# EAGLE board main (EAGLE 8.3.2), part 1 of 2
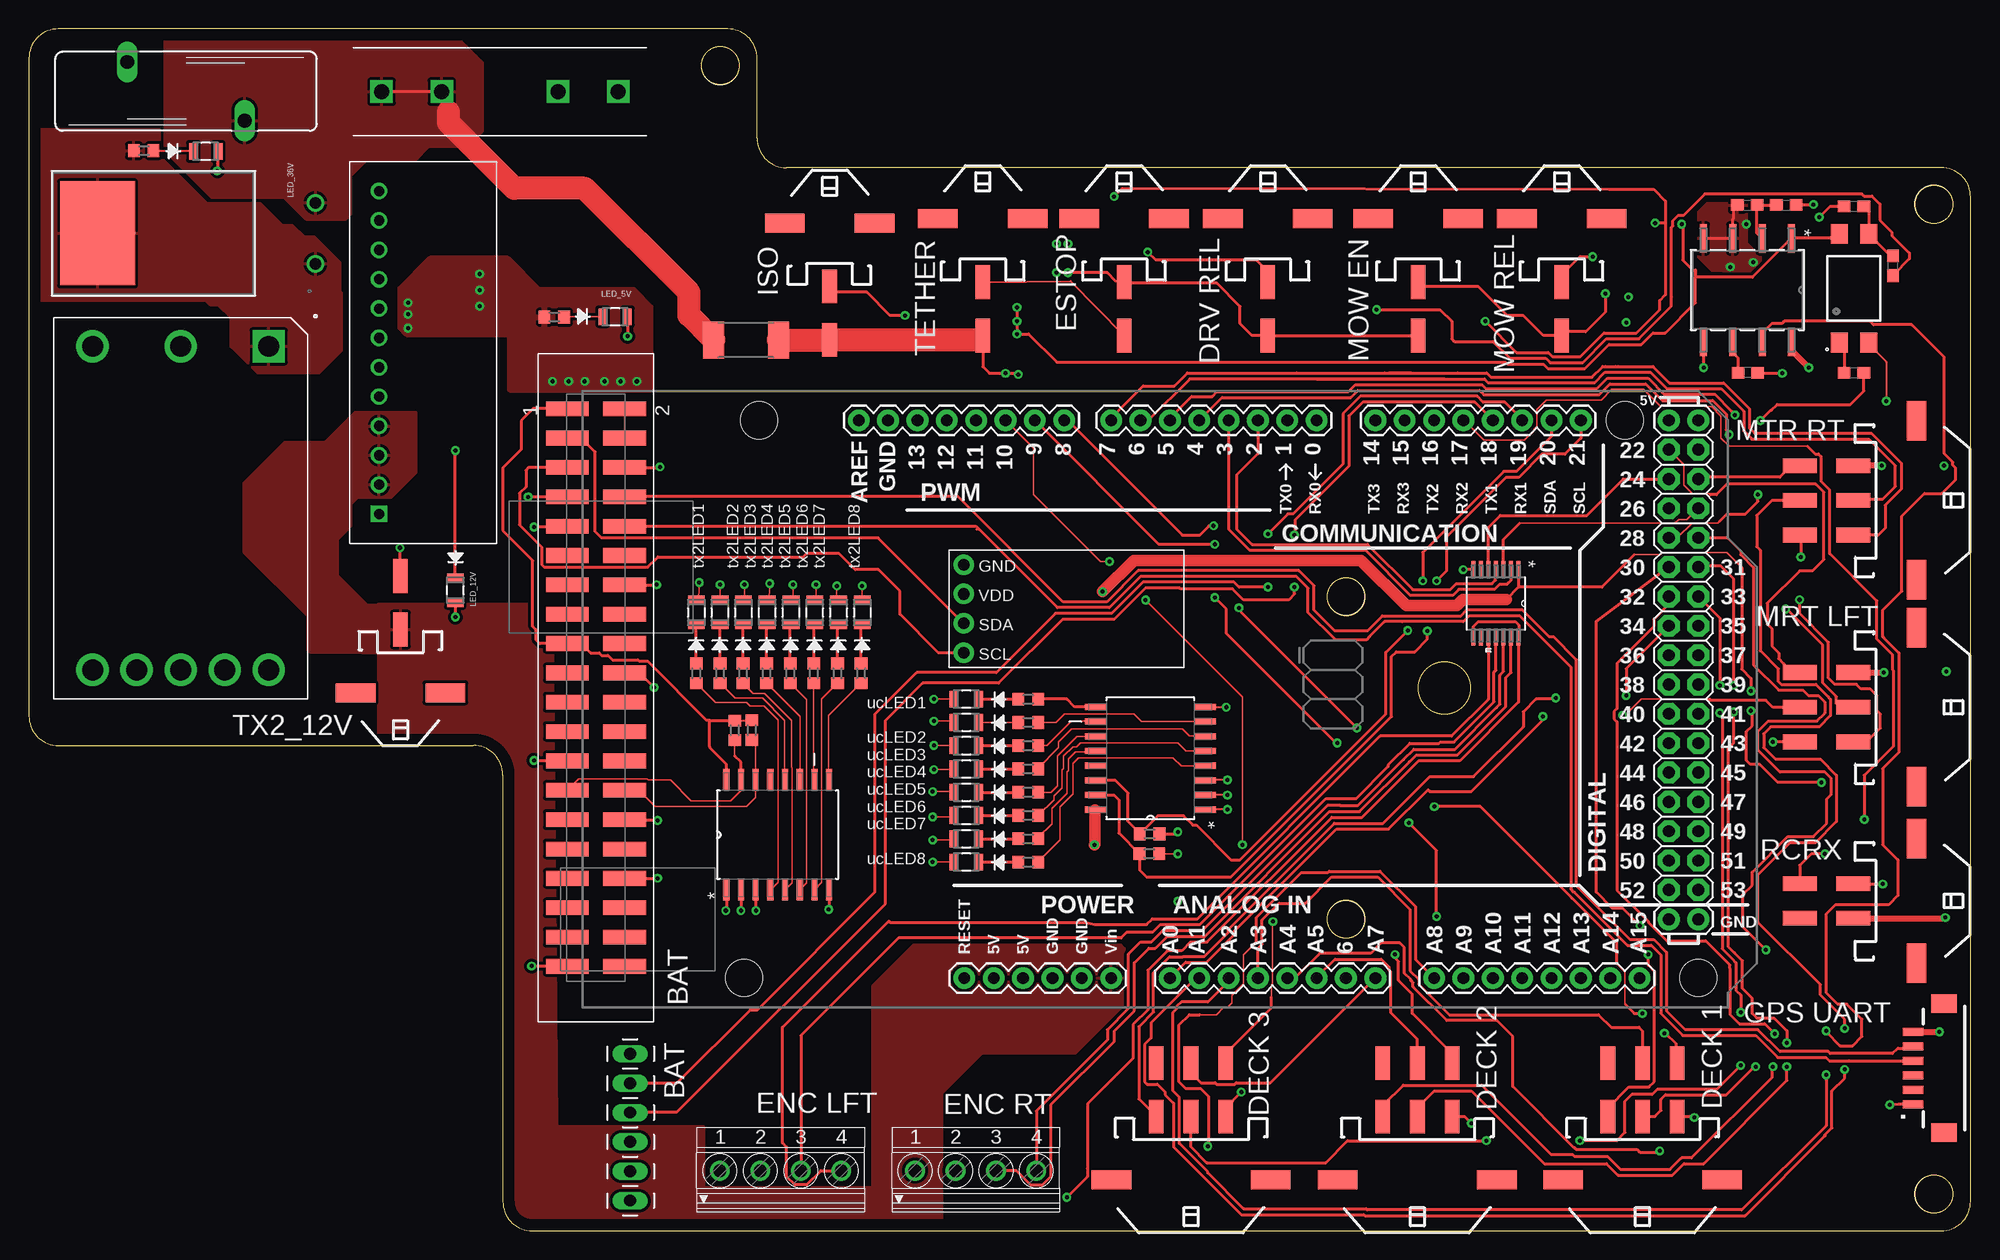
[diagram p0: board, top side]
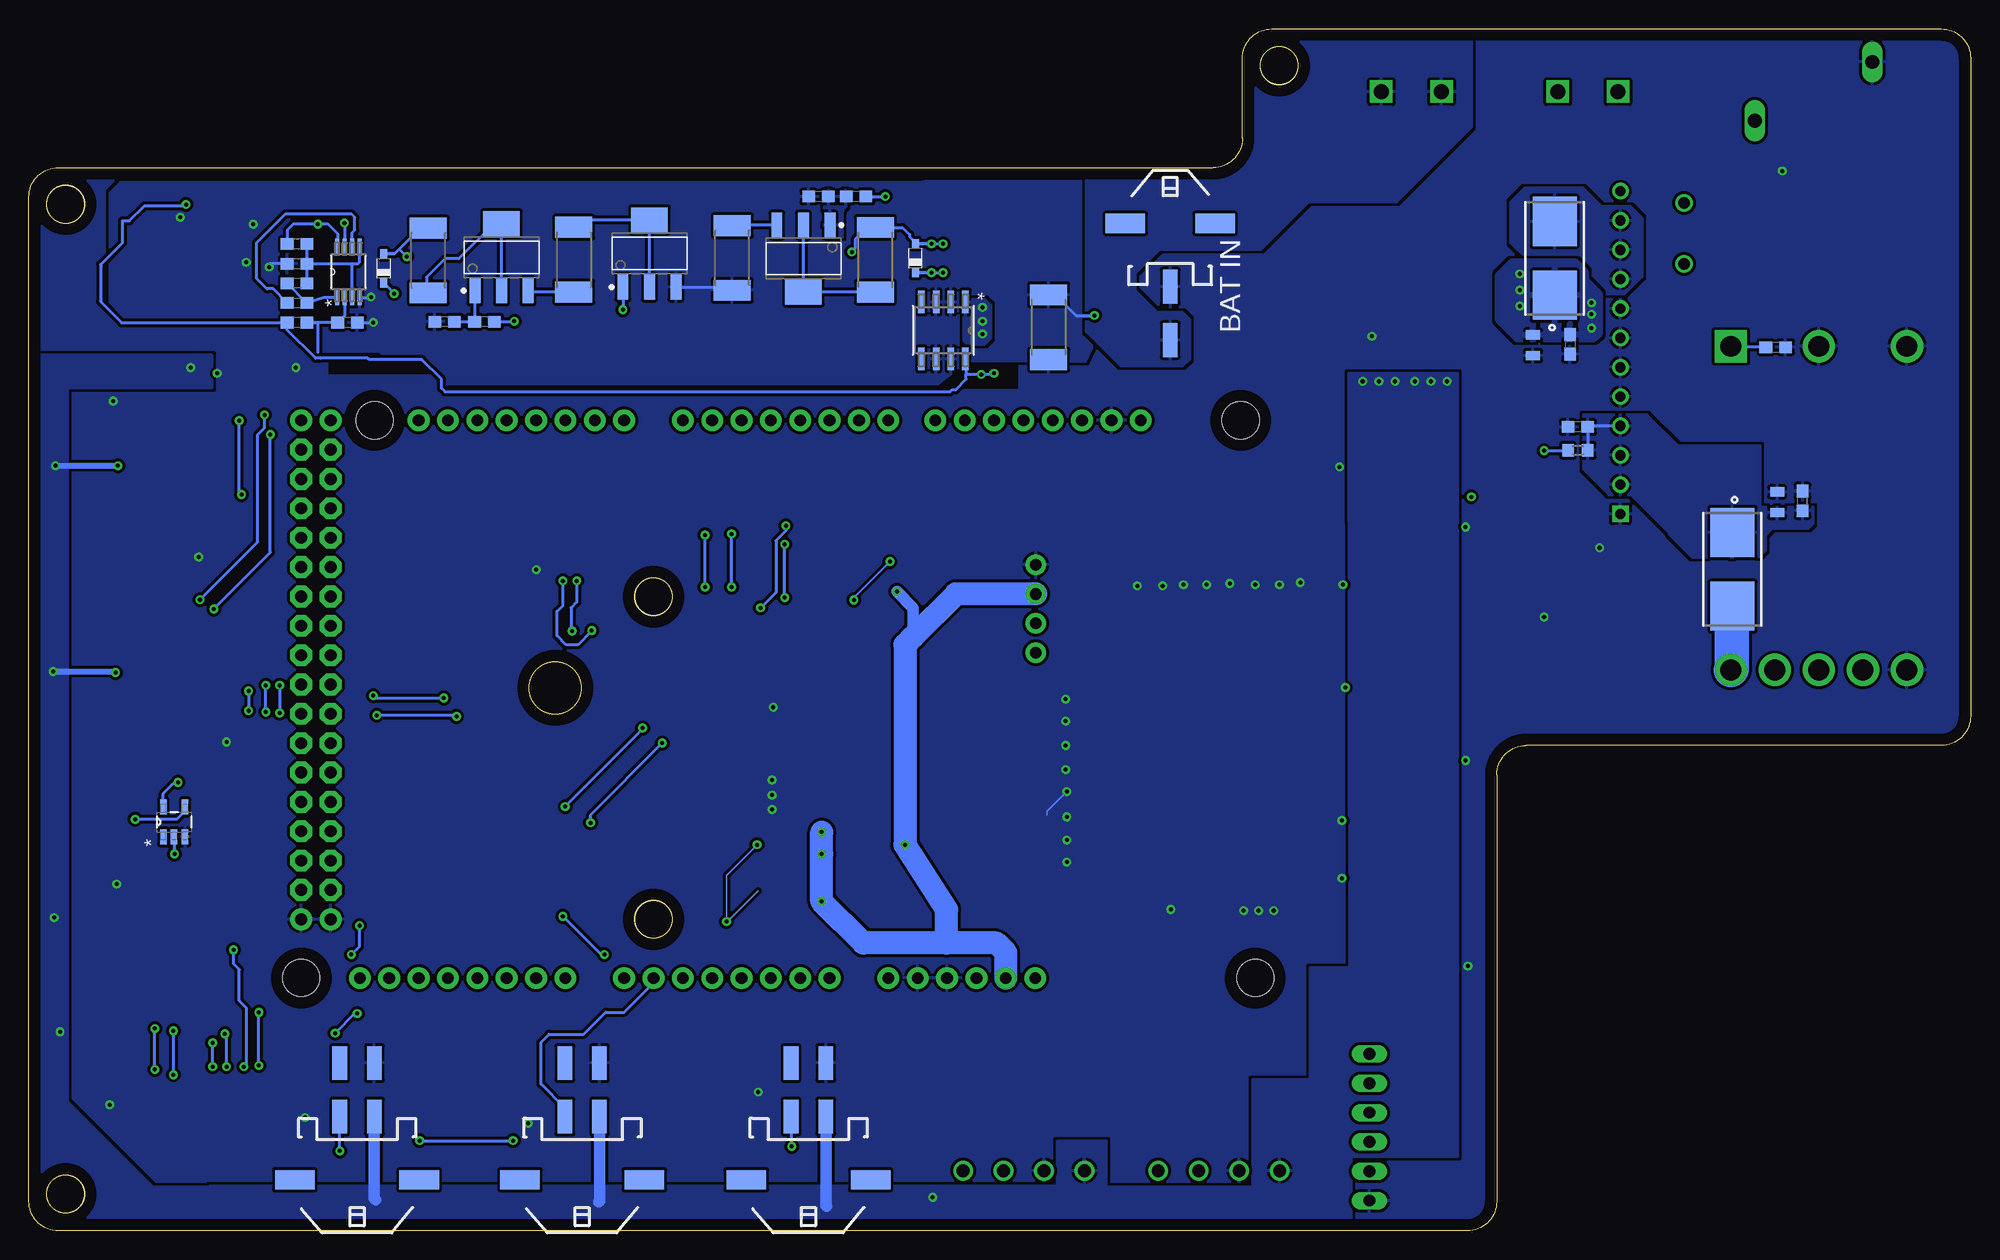
[diagram p1: board, bottom side, seen from below]

Size 168 x 104 mm. Coordinates in mm from the lower left corner, seen from the top.
Outline: 41,39.46 41,2.54 arc90 43.54,0 165.46,0 arc90 168,2.54 168,89.46 arc90 165.46,92 65.54,92 arc-90 63,94.54 63,101.46 arc90 60.46,104 2.54,104 arc90 0,101.46 0,44.54 arc90 2.54,42 38.46,42 arc-90 41,39.46
Outline: circle at 164.82,88.83 radius 1.63
Outline: circle at 164.82,3.17 radius 1.63
Outline: circle at 59.82,100.82 radius 1.63
Outline: circle at 113.96,54.85 radius 1.63
Outline: circle at 113.96,26.95 radius 1.63
Outline: circle at 122.46,46.97 radius 2.25
Copper layers (1*16): Top 0.035mm / dielectric 1.5mm / Bottom 0.035mm
Design rules "default *": minimum track width 0.15mm, minimum drill 0.33mm, track to track 10mil, track to pad 10mil, pad to pad 10mil, via to via 10mil, smd to smd 10mil, copper to edge 40mil, drill to drill 6mil, minimum pad ring 10mil, minimum via ring 8mil, stop-mask expansion 3mil, vias tented up to drill 0mil, thermal gap 10mil
Holes 3.26 mm at 164.82,88.83 59.82,100.82 164.82,3.17
Holes 4.5 mm at 122.46,46.97

## Footprints (pad centres in the part's own frame; a part is rotated, then mirrored left to right if it is on the bottom)
1X06 = drill 1.016 long: 1 -6.35,0; 2 -3.81,0; 3 -1.27,0; 4 1.27,0; 5 3.81,0; 6 6.35,0
LED_CMD17-21VGD_TR8 = smd 0.762 x 1.448: 1 -1.067,0; 2 1.067,0
R0603 = smd 1 x 1.1: 1 -0.85,0; 2 0.85,0
SOIC127P1032X265-16N = smd 1.803 x 0.533: 1 -4.775,4.445; 2 -4.775,3.175; 3 -4.775,1.905; 4 -4.775,0.635; 5 -4.775,-0.635; 6 -4.775,-1.905; 7 -4.775,-3.175; 8 -4.775,-4.445; 9 4.775,-4.445; 10 4.775,-3.175; 11 4.775,-1.905; 12 4.775,-0.635; 13 4.775,0.635; 14 4.775,1.905; 15 4.775,3.175; 16 4.775,4.445
TSM-120-XX-XXX-D = smd 1.27 x 3.683: 1 24.13,2.477; 2 24.13,-2.477; 3 21.59,2.477; 4 21.59,-2.477; 5 19.05,2.477; 6 19.05,-2.477; 7 16.51,2.477; 8 16.51,-2.477; 9 13.97,2.477; 10 13.97,-2.477; 11 11.43,2.477; 12 11.43,-2.477; 13 8.89,2.477; 14 8.89,-2.477; 15 6.35,2.477; 16 6.35,-2.477; 17 3.81,2.477; 18 3.81,-2.477; 19 1.27,2.477; 20 1.27,-2.477; 21 -1.27,2.477; 22 -1.27,-2.477; 23 -3.81,2.477; 24 -3.81,-2.477; 25 -6.35,2.477; 26 -6.35,-2.477; 27 -8.89,2.477; 28 -8.89,-2.477; 29 -11.43,2.477; 30 -11.43,-2.477; 31 -13.97,2.477; 32 -13.97,-2.477; 33 -16.51,2.477; 34 -16.51,-2.477; 35 -19.05,2.477; 36 -19.05,-2.477; 37 -21.59,2.477; 38 -21.59,-2.477; 39 -24.13,2.477; 40 -24.13,-2.477
ARDUINO_MEGA = drill 1.016 pad 1.88: 0 13.97,24.13; 1 11.43,24.13; 2 8.89,24.13; 3 6.35,24.13; 3.3V -13.97,-24.13; 4 3.81,24.13; 5 1.27,24.13; 5V@0 -11.43,-24.13; 5V@1 44.45,24.13; 5V@2 46.99,24.13; 6 -1.27,24.13; 7 -3.81,24.13; 8 -7.874,24.13; 9 -10.414,24.13; 10 -12.954,24.13; 11 -15.494,24.13; 12 -18.034,24.13; 13 -20.574,24.13; 14 19.05,24.13; 15 21.59,24.13; 16 24.13,24.13; 17 26.67,24.13; 18 29.21,24.13; 19 31.75,24.13; 20 34.29,24.13; 21 36.83,24.13; A0 1.27,-24.13; A1 3.81,-24.13; A2 6.35,-24.13; A3 8.89,-24.13; A4 11.43,-24.13; A5 13.97,-24.13; A6 16.51,-24.13; A7 19.05,-24.13; A8 24.13,-24.13; A9 26.67,-24.13; A10 29.21,-24.13; A11 31.75,-24.13; A12 34.29,-24.13; A13 36.83,-24.13; A14 39.37,-24.13; A15 41.91,-24.13; AREF -25.654,24.13; GND@0 -8.89,-24.13; GND@1 -6.35,-24.13; GND@2 44.45,-19.05; GND@3 46.99,-19.05; GND@4 -23.114,24.13; RESET -16.51,-24.13; VIN -3.81,-24.13 | drill 1.016 pad 1.88 octagon: 22 44.45,21.59; 23 46.99,21.59; 24 44.45,19.05; 25 46.99,19.05; 26 44.45,16.51; 27 46.99,16.51; 28 44.45,13.97; 29 46.99,13.97; 30 44.45,11.43; 31 46.99,11.43; 32 44.45,8.89; 33 46.99,8.89; 34 44.45,6.35; 35 46.99,6.35; 36 44.45,3.81; 37 46.99,3.81; 38 44.45,1.27; 39 46.99,1.27; 40 44.45,-1.27; 41 46.99,-1.27; 42 44.45,-3.81; 43 46.99,-3.81; 44 44.45,-6.35; 45 46.99,-6.35; 46 44.45,-8.89; 47 46.99,-8.89; 48 44.45,-11.43; 49 46.99,-11.43; 50 44.45,-13.97; 51 46.99,-13.97; 52 44.45,-16.51; 53 46.99,-16.51 | hole 3.2: -34.29,24.13; -35.56,-24.13; 16.51,8.89; 16.51,-19.05; 40.64,24.13; 46.99,-24.13
43045-0609 = smd 1.27 x 2.92: P$1 3,5.47; P$2 0,5.47; P$3 -3,5.47; P$4 3,10.1; P$5 0,10.1; P$6 -3,10.1 | smd 3.43 x 1.65: TAB1 -6.88,0; TAB2 6.88,0
43045-0409 = smd 1.27 x 2.92: P$1 1.5,5.47; P$2 -1.5,5.47; P$3 1.5,10.1; P$4 -1.5,10.1 | smd 3.43 x 1.65: TAB1 -5.38,0; TAB2 5.38,0
C0603 = smd 1.1 x 1: 1 -0.85,0; 2 0.85,0
FUSE_0154004.DR = smd 4.24 x 3.81: 1 -3.19,0; 2 3.19,0
0805 = smd 0.8 x 1.2: 1 -0.9,0; 2 0.9,0
SIP-12 = drill 0.889 pad 1.422 square: ENABLE 0,13.97 | drill 0.889 pad 1.422: GND1 0,3.81; GND2 0,1.27; GND3 0,-1.27; GND4 0,-3.81; VIN1 0,11.43; VIN2 0,8.89; VIN3 0,6.35; VOUT1 0,-6.35; VOUT2 0,-8.89; VOUT3 0,-11.43; VOUT-ADJ 0,-13.97
V36SE12004NRFA-TH = drill 1.8 pad 2.8: +SENSE 14,3.81; +VOUT 14,7.62; -SENSE 14,-3.81; -VIN -14,-7.62; -VOUT 14,-7.62; ENABLE -14,0; TRIM 14,0 | drill 1.8 pad 2.8 square: +VIN -14,7.62
SOT95P280X145-5N = smd 1.27 x 0.559: 1 -1.295,0.94; 2 -1.295,0; 3 -1.295,-0.94; 4 1.295,-0.94; 5 1.295,0.94
TO220AC = drill 1.016 pad 1.524: 1 -5.283,-28.042; 3 0,-28.042 | smd 8.992 x 6.477: 2 -2.64,-9.195
LF445_0.807IN = drill 1.295 square: 1 -10.236,0; 2 -5.029,0; 3 5.029,0; 4 10.236,0
0603 = smd 1.1 x 1: 1 -0.85,0; 2 0.85,0
DUB8 = smd 2.451 x 0.61: 1 -4.477,3.81; 2 -4.477,1.27; 3 -4.477,-1.27; 4 -4.477,-3.81; 5 4.477,-3.81; 6 4.477,-1.27; 7 4.477,1.27; 8 4.477,3.81
SOIC254P1016X390-4N = smd 1.7 x 1.45: 1 -4.7,1.27; 2 -4.7,-1.27; 3 4.7,-1.27; 4 4.7,1.27
43045-0209 = smd 1.27 x 2.92: P$1 0,5.47; P$2 0,10.1 | smd 3.43 x 1.65: TAB1 -3.88,0; TAB2 3.88,0
S20K440 = drill 1.194 long: 1 -2.54,-5.08; 2 2.54,5.08
R2512 = smd 1.8 x 3.2: 1 -2.8,0; 2 2.8,0
M08A = smd 1.981 x 0.559: 1 -2.464,1.905; 2 -2.464,0.635; 3 -2.464,-0.635; 4 -2.464,-1.905; 5 2.464,-1.905; 6 2.464,-0.635; 7 2.464,0.635; 8 2.464,1.905
SOD323_ST = smd 0.8 x 0.6: A 1.25,0; C -1.25,0
SOT230P700X160-4N = smd 2.15 x 0.95: 1 -2.9,2.3; 2 -2.9,0; 3 -2.9,-2.3 | smd 2.15 x 3.15: 4 2.9,0
SOP65P490X110-8N = smd 1.372 x 0.356: 1 -2.21,0.965; 2 -2.21,0.33; 3 -2.21,-0.33; 4 -2.21,-0.965; 5 2.21,-0.965; 6 2.21,-0.33; 7 2.21,0.33; 8 2.21,0.965
1751264 = drill 1.1 pad 1.7: 1 -5.25,-0.1; 2 -1.75,-0.1; 3 1.75,-0.1; 4 5.25,-0.1
SPARKFUN-9DOF-BREAKOUT = drill 1 pad 1.778: GND 1.27,8.89; SCL 1.27,1.27; SDA 1.27,3.81; VDD 1.27,6.35
DF13C-6P-1.25V = smd 1.6 x 2.2: M$0 5.575,-1.8; M$1 -5.575,-1.8 | smd 0.7 x 1.8: P$1 -3.125,0.9; P$2 -1.875,0.9; P$3 -0.625,0.9; P$4 0.625,0.9; P$5 1.875,0.9; P$6 3.125,0.9
SOP65P640X120-14N = smd 1.473 x 0.356: 1 -2.921,1.956; 2 -2.921,1.295; 3 -2.921,0.66; 4 -2.921,0; 5 -2.921,-0.66; 6 -2.921,-1.295; 7 -2.921,-1.956; 8 2.921,-1.956; 9 2.921,-1.295; 10 2.921,-0.66; 11 2.921,0; 12 2.921,0.66; 13 2.921,1.295; 14 2.921,1.956

## Placement (x,y rotation side)
JETSON1:JETSON_J17_UART1:JP3  61300611121  [1X06]  52.02,8.95 90 top
JETSON1:JETSON_TX2_J21_EXPANSION1:LED1  CMD17-21VGD_TR8  [LED_CMD17-21VGD_TR8]  57.76,53.5 90 top
JETSON1:JETSON_TX2_J21_EXPANSION1:LED2  CMD17-21VGD_TR8  [LED_CMD17-21VGD_TR8]  61.82,53.5 90 top
JETSON1:JETSON_TX2_J21_EXPANSION1:LED3  CMD17-21VGD_TR8  [LED_CMD17-21VGD_TR8]  65.93,53.5 90 top
JETSON1:JETSON_TX2_J21_EXPANSION1:LED4  CMD17-21VGD_TR8  [LED_CMD17-21VGD_TR8]  70.05,53.5 90 top
JETSON1:JETSON_TX2_J21_EXPANSION1:LED5  CMD17-21VGD_TR8  [LED_CMD17-21VGD_TR8]  72.11,53.5 90 top
JETSON1:JETSON_TX2_J21_EXPANSION1:LED6  CMD17-21VGD_TR8  [LED_CMD17-21VGD_TR8]  67.99,53.5 90 top
JETSON1:JETSON_TX2_J21_EXPANSION1:LED7  CMD17-21VGD_TR8  [LED_CMD17-21VGD_TR8]  63.88,53.5 90 top
JETSON1:JETSON_TX2_J21_EXPANSION1:LED8  CMD17-21VGD_TR8  [LED_CMD17-21VGD_TR8]  59.8,53.5 90 top
JETSON1:JETSON_TX2_J21_EXPANSION1:R1  60  [R0603]  57.74,48.23 270 top
JETSON1:JETSON_TX2_J21_EXPANSION1:R2  60  [R0603]  61.79,48.23 270 top
JETSON1:JETSON_TX2_J21_EXPANSION1:R3  60  [R0603]  65.87,48.23 270 top
JETSON1:JETSON_TX2_J21_EXPANSION1:R4  60  [R0603]  69.96,48.23 270 top
JETSON1:JETSON_TX2_J21_EXPANSION1:R5  60  [R0603]  72,48.23 270 top
JETSON1:JETSON_TX2_J21_EXPANSION1:R6  60  [R0603]  67.91,48.23 270 top
JETSON1:JETSON_TX2_J21_EXPANSION1:R7  60  [R0603]  63.83,48.23 270 top
JETSON1:JETSON_TX2_J21_EXPANSION1:R8  60  [R0603]  59.8,48.23 270 top
JETSON1:JETSON_TX2_J21_EXPANSION1:R9  10k  [R0603]  61.07,43.3 90 top
JETSON1:JETSON_TX2_J21_EXPANSION1:R10  10k  [R0603]  62.54,43.32 90 top
JETSON1:JETSON_TX2_J21_EXPANSION1:U1  PCF8574ATD  [SOIC127P1032X265-16N]  64.79,34.27 90 top
JETSON1:JETSON_TX2_J21_EXPANSION1:U$3  TSM-120-XX-XXX-DV  [TSM-120-XX-XXX-D]  49.06,47 90 top
MICROCONTROLLER1:LED1  CMD17-21VGD_TR8  [LED_CMD17-21VGD_TR8]  81.11,31.9 180 top
MICROCONTROLLER1:LED2  CMD17-21VGD_TR8  [LED_CMD17-21VGD_TR8]  81.11,35.93 180 top
MICROCONTROLLER1:LED3  CMD17-21VGD_TR8  [LED_CMD17-21VGD_TR8]  81.11,39.96 180 top
MICROCONTROLLER1:LED4  CMD17-21VGD_TR8  [LED_CMD17-21VGD_TR8]  81.11,43.99 180 top
MICROCONTROLLER1:LED5  CMD17-21VGD_TR8  [LED_CMD17-21VGD_TR8]  81.11,46 180 top
MICROCONTROLLER1:LED6  CMD17-21VGD_TR8  [LED_CMD17-21VGD_TR8]  81.11,41.97 180 top
MICROCONTROLLER1:LED7  CMD17-21VGD_TR8  [LED_CMD17-21VGD_TR8]  81.11,37.94 180 top
MICROCONTROLLER1:LED8  CMD17-21VGD_TR8  [LED_CMD17-21VGD_TR8]  81.11,33.91 180 top
MICROCONTROLLER1:R1  60  [R0603]  86.47,31.9 0 top
MICROCONTROLLER1:R2  60  [R0603]  86.47,35.93 0 top
MICROCONTROLLER1:R3  60  [R0603]  86.47,39.96 0 top
MICROCONTROLLER1:R4  60  [R0603]  86.47,43.99 0 top
MICROCONTROLLER1:R5  60  [R0603]  86.47,46 0 top
MICROCONTROLLER1:R6  60  [R0603]  86.47,41.97 0 top
MICROCONTROLLER1:R7  60  [R0603]  86.47,37.94 0 top
MICROCONTROLLER1:R8  60  [R0603]  86.47,33.91 0 top
MICROCONTROLLER1:R9  10k  [R0603]  96.94,32.62 0 top
MICROCONTROLLER1:R10  10k  [R0603]  96.97,34.34 0 top
MICROCONTROLLER1:U1  PCF8574ATD  [SOIC127P1032X265-16N]  97.03,40.88 180 top
MICROCONTROLLER1:U$1  ARDUINO_MEGA_R3FULL  [ARDUINO_MEGA]  97.45,46 0 top
MOTOR_TOP1:JDL  43045-0609  [43045-0609]  163.32,45.3 90 top
MOTOR_TOP1:JDR  43045-0609  [43045-0609]  163.32,63.2 90 top
MOTOR_TOP1:X3  43045-0609  [43045-0609]  139.61,4.41 0 top
MOTOR_TOP1:X4  43045-0609  [43045-0609]  120.13,4.41 0 top
MOTOR_TOP1:X5  43045-0609  [43045-0609]  100.55,4.41 0 top
MOTOR_TOP1:X6  43045-0409  [43045-0409]  139.61,4.41 0 bottom
MOTOR_TOP1:X7  43045-0409  [43045-0409]  120.13,4.41 0 bottom
MOTOR_TOP1:X8  43045-0409  [43045-0409]  100.55,4.41 0 bottom
POWER_TOP1:C1  1uF  [C0603]  16.87,76.45 0 bottom
POWER_TOP1:C2  100uF  [C0603]  14.54,63.16 90 bottom
POWER_TOP1:C3  1uF  [C0603]  33.98,69.56 180 bottom
POWER_TOP1:C4  100uF  [C0603]  34.66,76.7 270 bottom
POWER_TOP1:F1  0154004.DR  [FUSE_0154004.DR]  35.99,84.15 90 bottom
POWER_TOP1:F2  0154004.DR  [FUSE_0154004.DR]  20.61,57.23 270 bottom
POWER_TOP1:LED1  CMD17-21VGD_TR8  [LED_CMD17-21VGD_TR8]  15.3,93.4 0 top
POWER_TOP1:LED2  CMD17-21VGD_TR8  [LED_CMD17-21VGD_TR8]  36.89,55.43 270 top
POWER_TOP1:LED3  CMD17-21VGD_TR8  [LED_CMD17-21VGD_TR8]  50.72,79.09 0 top
POWER_TOP1:MOV1  AVR-M2012C120MT6AB  [0805]  16.74,63.04 90 bottom
POWER_TOP1:MOV2  VC080503A100DP  [0805]  37.86,76.62 270 bottom
POWER_TOP1:R2  495  [R0603]  33.98,67.54 0 bottom
POWER_TOP1:R3  145  [R0603]  45.46,79.06 180 top
POWER_TOP1:R4  1695  [R0603]  9.94,93.46 180 top
POWER_TOP1:U$1  R-745.0P  [SIP-12]  30.3,75.99 180 top
POWER_TOP1:U$2  V36SE12004NRFA  [V36SE12004NRFA-TH]  13.13,62.53 270 top
RC_INPUT1:U1  NC7SZ04M5  [SOT95P280X145-5N]  155.43,35.37 90 bottom
RC_INPUT1:X1  43045-0409  [43045-0409]  163.32,28.54 90 top
RELAY_CONTROL_TOP1:D2  STPS20M60D  [TO220AC]  -3.25,88.95 90 top
RELAY_CONTROL_TOP1:FH3  FUSE_HOLDER_0.205X0.787IN  [LF445_0.807IN]  40.75,98.57 180 top
RELAY_CONTROL_TOP1:ISO1:R1  47k  [0603]  157.91,88.65 0 top
RELAY_CONTROL_TOP1:ISO1:R2  330k  [0603]  148.72,74.25 180 top
RELAY_CONTROL_TOP1:ISO1:R3  1.20k  [0603]  157.91,74.25 0 top
RELAY_CONTROL_TOP1:ISO1:R4  1.20k  [0603]  161.3,83.5 90 top
RELAY_CONTROL_TOP1:ISO1:R5  330k  [0603]  152.04,88.75 0 top
RELAY_CONTROL_TOP1:ISO1:R6  2.0k  [0603]  148.67,88.75 0 top
RELAY_CONTROL_TOP1:ISO1:U1  AMC1200SDUB  [DUB8]  148.69,81.4 270 top
RELAY_CONTROL_TOP1:ISO1:U2  SFH615A-3X009T  [SOIC254P1016X390-4N]  157.91,81.55 90 top
RELAY_CONTROL_TOP1:JBAT  43045-0209  [43045-0209]  69.25,87.17 180 bottom
RELAY_CONTROL_TOP1:JDC  43045-0209  [43045-0209]  107.19,87.56 180 top
RELAY_CONTROL_TOP1:JISO  43045-0209  [43045-0209]  69.28,87.18 180 top
RELAY_CONTROL_TOP1:JMC  43045-0209  [43045-0209]  132.62,87.56 180 top
RELAY_CONTROL_TOP1:MOV1  MOV-20D470K  [S20K440]  13.6,98.6 90 top
RELAY_CONTROL_TOP1:R1  RES_0R_2512_1W  [R2512]  79.77,78.18 270 bottom
RELAY_CONTROL_TOP1:R2  RES_0R_2512_1W  [R2512]  62.05,77.07 180 top
RELAY_CONTROL_TOP1:REGULATOR1:U1  LM2936HVMAX-5.0/NOPB  [M08A]  88.87,77.91 270 bottom
RELAY_CONTROL_TOP1:RELAY_CONTROL1:D1  1N4148WSTR  [SOD323_ST]  91.3,84.16 90 bottom
RELAY_CONTROL_TOP1:RELAY_CONTROL1:D2  1N4148WSTR  [SOD323_ST]  137.3,83.28 90 bottom
RELAY_CONTROL_TOP1:RELAY_CONTROL1:JESTP  43045-0209  [43045-0209]  94.76,87.56 180 top
RELAY_CONTROL_TOP1:RELAY_CONTROL1:JMOW  43045-0209  [43045-0209]  120.2,87.56 180 top
RELAY_CONTROL_TOP1:RELAY_CONTROL1:JTHR  43045-0209  [43045-0209]  82.53,87.56 180 top
RELAY_CONTROL_TOP1:RELAY_CONTROL1:R1  1.20k  [0603]  128.58,78.65 180 bottom
RELAY_CONTROL_TOP1:RELAY_CONTROL1:R3  1.20k  [0603]  96.43,89.5 180 bottom
RELAY_CONTROL_TOP1:RELAY_CONTROL1:R11  47k  [0603]  99.68,89.5 180 bottom
RELAY_CONTROL_TOP1:RELAY_CONTROL1:R13  47k  [0603]  132.03,78.65 180 bottom
RELAY_CONTROL_TOP1:RELAY_CONTROL1:RCCB1  RES_52R3_2512_1W_1%  [R2512]  94.75,84.02 90 bottom
RELAY_CONTROL_TOP1:RELAY_CONTROL1:RCCB2  RES_52R3_2512_1W_1%  [R2512]  133.45,83.96 90 bottom
RELAY_CONTROL_TOP1:RELAY_CONTROL1:RCCD  RES_52R3_2512_1W_1%  [R2512]  107.15,84.18 90 bottom
RELAY_CONTROL_TOP1:RELAY_CONTROL1:RCCM  RES_52R3_2512_1W_1%  [R2512]  120.85,84.03 270 bottom
RELAY_CONTROL_TOP1:RELAY_CONTROL1:U$2  ZXTN25100DGTA  [SOT230P700X160-4N]  114.31,84.56 90 bottom
RELAY_CONTROL_TOP1:RELAY_CONTROL1:U$7  ZXTN25100DGTA  [SOT230P700X160-4N]  127.11,84.24 90 bottom
RELAY_CONTROL_TOP1:RELAY_CONTROL1:U$10  ZXTN25100DGTA  [SOT230P700X160-4N]  100.99,84.12 270 bottom
RELAY_CONTROL_TOP1:RELAY_CONTROL1:UVLO1:R1  750K  [0603]  144.8,81.98 180 bottom
RELAY_CONTROL_TOP1:RELAY_CONTROL1:UVLO1:R2  150k  [0603]  144.8,85.38 180 bottom
RELAY_CONTROL_TOP1:RELAY_CONTROL1:UVLO1:R3  180k  [0603]  144.8,83.68 0 bottom
RELAY_CONTROL_TOP1:RELAY_CONTROL1:UVLO1:R4  47k  [0603]  144.8,80.28 0 bottom
RELAY_CONTROL_TOP1:RELAY_CONTROL1:UVLO1:R7  6.8k  [0603]  140.43,78.58 180 bottom
RELAY_CONTROL_TOP1:RELAY_CONTROL1:UVLO1:R8  75k  [0603]  144.8,78.58 180 bottom
RELAY_CONTROL_TOP1:RELAY_CONTROL1:UVLO1:U1  LMV762MM  [SOP65P490X110-8N]  140.36,82.97 90 bottom
SENSOR_TOP1:ENCODER1:X1  1751264  [1751264]  81.92,5.29 0 top
SENSOR_TOP1:ENCODER2:X1  1751264  [1751264]  65.04,5.29 0 top
SENSOR_TOP1:IMU1:U$1  LSM9DS1  [SPARKFUN-9DOF-BREAKOUT]  79.61,48.75 0 top
SENSOR_TOP1:REACH_GPS1:U$1  DF13-6P-1.25V  [DF13C-6P-1.25V]  163.91,14.08 90 top
U301  LSF0204PWR  [SOP65P640X120-14N]  126.93,54.28 270 top
X101  43045-0209  [43045-0209]  32.15,46.55 0 top

## Library data of the parts
JETSON1:JETSON_J17_UART1:JP3 = power_connectors; DESCRIPTION: CONN HEADER 6 POS 2.54; MANUFACTURER: Wurth; MPN: 61300611121; SILK: TX2UART
JETSON1:JETSON_TX2_J21_EXPANSION1:LED1-JETSON1:JETSON_TX2_J21_EXPANSION1:LED8 MICROCONTROLLER1:LED1-MICROCONTROLLER1:LED8 POWER_TOP1:LED1-POWER_TOP1:LED3 = CMD17-21VGD_TR8; AVAILABILITY: Good; DESCRIPTION: Led, Green, 1.25mm x 1.4mm, 7mcd, 570nm, Full Reel; MANUFACTURER: Chicago Miniature Lighting; MPN: CMD17-21VGD/TR8; PACKAGE: 0805 Chicago Miniature Lighting; PRICE: 0.18 USD
JETSON1:JETSON_TX2_J21_EXPANSION1:R1-JETSON1:JETSON_TX2_J21_EXPANSION1:R10 MICROCONTROLLER1:R1-MICROCONTROLLER1:R10 = resistor
JETSON1:JETSON_TX2_J21_EXPANSION1:U1 MICROCONTROLLER1:U1 = PCF8574ATD; AVAILABILITY: Unavailable; DESCRIPTION: Smt t/r; MANUFACTURER: NXP Semiconductors; MPN: PCF8574ATD-T; PACKAGE: SOIC-16 NXP Semiconductors; PRICE: 1.10 USD
JETSON1:JETSON_TX2_J21_EXPANSION1:U$3 = TSM-120-XX-XXX-DV; DESCRIPTION: CONN HEADER 30POS SMT VERT 30AU; MANUFACTURER: 3M; MPN: N2530-6V0C-RB-WF; SILK: TX2_J21
MICROCONTROLLER1:U$1 = SparkFun-Boards
MOTOR_TOP1:JDL = con-molex-micro-fit-3_0; DESCRIPTION: CONN HEADER 6POS RT ANG SMD TIN; MANUFACTURER: Phoenix Contact; MPN: 43045-0609; SILK: MTRL
MOTOR_TOP1:JDR = con-molex-micro-fit-3_0; DESCRIPTION: CONN HEADER 6POS RT ANG SMD TIN; MANUFACTURER: Phoenix Contact; MPN: 43045-0609; SILK: MTRR
MOTOR_TOP1:X3-MOTOR_TOP1:X5 = con-molex-micro-fit-3_0; DESCRIPTION: CONN HEADER 6POS RT ANG SMD TIN; MANUFACTURER: Phoenix Contact; MPN: 43045-0609
MOTOR_TOP1:X6-MOTOR_TOP1:X8 = con-molex-micro-fit-3_0; DESCRIPTION: CONN HEADER 4POS RT ANG SMD TIN; MANUFACTURER: Molex; MPN: 43045-0409
POWER_TOP1:C1-POWER_TOP1:C4 POWER_TOP1:R2-POWER_TOP1:R4 = rcl
POWER_TOP1:F1 POWER_TOP1:F2 = fuses; AVAILABILITY: Good; DESCRIPTION: Fuse Chip Very Fast Acting 4A SMD Solder Pad 9.73 X 5.03 X 3.81mm T/R CSA/PSE/UL; MANUFACTURER: Littelfuse; MPN: 0154004.DR; PACKAGE: None; PRICE: 1.54 USD
POWER_TOP1:MOV1 = power_supplies; DESCRIPTION: VARISTOR 12V 60A 0805; MANUFACTURER: TDK Corporation; MPN: AVR-M2012C120MT6AB
POWER_TOP1:MOV2 = power_supplies; DESCRIPTION: VARISTOR 5V 40A 0805; MANUFACTURER: Avx; MPN: VC080503A100DP
POWER_TOP1:U$1 = power_supplies; DESCRIPTION: CONV DC/DC 2A 6.5-28VIN 5V; MANUFACTURER: Recom; MPN: R-725.0P
POWER_TOP1:U$2 = power_supplies; DESCRIPTION: MODULE DC/DC 1/16 BRICK 12V 4A; MANUFACTURER: Delta Electronics; MPN: V36SE12004NRFA
RC_INPUT1:U1 = NC7SZ04M5; AVAILABILITY: Good; DESCRIPTION: NC7SZ04 Series 5.5 V Surface Mount TinyLogic UHS Inverter - SOT-23-5; MANUFACTURER: Fairchild Semiconductor; MPN: NC7SZ04M5; PACKAGE: SOT-23-5 Fairchild Semiconductor; PRICE: 0.28 USD
RC_INPUT1:X1 = con-molex-micro-fit-3_0; DESCRIPTION: CONN HEADER 4POS RT ANG SMD TIN; MANUFACTURER: Molex; MPN: 43045-0409; SILK: RCRX
RELAY_CONTROL_TOP1:D2 = discrete; DESCRIPTION: SCHOTTKY 60V 20A; MANUFACTURER: STMicroelectronics; MPN: STPS20M60D
RELAY_CONTROL_TOP1:FH3 = power_supplies; DESCRIPTION: 2x FUSE CLIP CARTRIDGE 600V 20A PCB; MANUFACTURER: LittelFuse; MPN: 01000020Z
RELAY_CONTROL_TOP1:ISO1:R1 RELAY_CONTROL_TOP1:RELAY_CONTROL1:R11 RELAY_CONTROL_TOP1:RELAY_CONTROL1:R13 RELAY_CONTROL_TOP1:RELAY_CONTROL1:UVLO1:R4 = SparkFun-Resistors; PROD_ID: RES-07871
RELAY_CONTROL_TOP1:ISO1:R2 RELAY_CONTROL_TOP1:ISO1:R5 = SparkFun-Resistors; PROD_ID: RES-08968
RELAY_CONTROL_TOP1:ISO1:R3 RELAY_CONTROL_TOP1:ISO1:R4 RELAY_CONTROL_TOP1:RELAY_CONTROL1:R1 RELAY_CONTROL_TOP1:RELAY_CONTROL1:R3 = SparkFun-Resistors; PROD_ID: RES-08413
RELAY_CONTROL_TOP1:ISO1:R6 = SparkFun-Resistors; PROD_ID: RES-08296
RELAY_CONTROL_TOP1:ISO1:U1 = power_supplies; DESCRIPTION: IC OPAMP ISOLATION 100KHZ 8SOP; MANUFACTURER: Texas Instruments; MPN: AMC1200SDUB
RELAY_CONTROL_TOP1:ISO1:U2 = SFH615A-3X009T; AVAILABILITY: Good; DESCRIPTION: Optocoupler DC-IN 1-CH Transistor DC-OUT 4-Pin PDIP SMD T/R; MANUFACTURER: Vishay Semiconductor; MPN: SFH615A-3X009T; PACKAGE: SMD-4 Vishay; PRICE: 0.48 USD
RELAY_CONTROL_TOP1:JBAT = con-molex-micro-fit-3_0; DESCRIPTION: CONN HEADER 2POS RT ANG SMD TIN; MANUFACTURER: Phoenix Contact; MPN: 43045-0209; SILK: BAT
RELAY_CONTROL_TOP1:JDC = con-molex-micro-fit-3_0; DESCRIPTION: CONN HEADER 2POS RT ANG SMD TIN; MANUFACTURER: Phoenix Contact; MPN: 43045-0209; SILK: DRIVE_REL
RELAY_CONTROL_TOP1:JISO = con-molex-micro-fit-3_0; DESCRIPTION: CONN HEADER 2POS RT ANG SMD TIN; MANUFACTURER: Phoenix Contact; MPN: 43045-0209; SILK: ISO
RELAY_CONTROL_TOP1:JMC = con-molex-micro-fit-3_0; DESCRIPTION: CONN HEADER 2POS RT ANG SMD TIN; MANUFACTURER: Phoenix Contact; MPN: 43045-0209; SILK: MOW_REL
RELAY_CONTROL_TOP1:MOV1 = power_supplies; DESCRIPTION: VARISTOR 47V 2KA DISC 20MM; MANUFACTURER: Bourns; MPN: MOV-20D470K
RELAY_CONTROL_TOP1:R1 RELAY_CONTROL_TOP1:R2 = passive; DESCRIPTION: RES SMD 0 OHM JUMPER 1W 2512; MANUFACTURER: Yageo; PART_NUMBER: RC2512JK-070RL
RELAY_CONTROL_TOP1:REGULATOR1:U1 = power_supplies; DESCRIPTION: IC REG LINEAR 5V 50MA 8SOIC; MANUFACTURER: Texas Instruments; MPN: LM2936HVMAX5.0NOPB
RELAY_CONTROL_TOP1:RELAY_CONTROL1:D1 RELAY_CONTROL_TOP1:RELAY_CONTROL1:D2 = discrete; DESCRIPTION: DIODE GEN PURP 75V 300MA SOD323; MANUFACTURER: SMC; MPN: 1N4148WSTR
RELAY_CONTROL_TOP1:RELAY_CONTROL1:JESTP = con-molex-micro-fit-3_0; DESCRIPTION: CONN HEADER 2POS RT ANG SMD TIN; MANUFACTURER: Phoenix Contact; MPN: 43045-0209; SILK: ESTOP
RELAY_CONTROL_TOP1:RELAY_CONTROL1:JMOW = con-molex-micro-fit-3_0; DESCRIPTION: CONN HEADER 2POS RT ANG SMD TIN; MANUFACTURER: Phoenix Contact; MPN: 43045-0209; SILK: MOW
RELAY_CONTROL_TOP1:RELAY_CONTROL1:JTHR = con-molex-micro-fit-3_0; DESCRIPTION: CONN HEADER 2POS RT ANG SMD TIN; MANUFACTURER: Phoenix Contact; MPN: 43045-0209; SILK: TETHER
RELAY_CONTROL_TOP1:RELAY_CONTROL1:RCCB1 RELAY_CONTROL_TOP1:RELAY_CONTROL1:RCCB2 RELAY_CONTROL_TOP1:RELAY_CONTROL1:RCCD RELAY_CONTROL_TOP1:RELAY_CONTROL1:RCCM = passive; DESCRIPTION: RES SMD 52.3 OHM 1% 1W 2512; MANUFACTURER: Rohm; PART_NUMBER: MCR100JZHF52R3
RELAY_CONTROL_TOP1:RELAY_CONTROL1:U$2 RELAY_CONTROL_TOP1:RELAY_CONTROL1:U$7 RELAY_CONTROL_TOP1:RELAY_CONTROL1:U$10 = discrete; DESCRIPTION: TRANS NPN 100V 3A SOT223; MANUFACTURER: Diodes Inc; MPN: ZXTN25100DGTA
RELAY_CONTROL_TOP1:RELAY_CONTROL1:UVLO1:R1 = SparkFun-Resistors; PROD_ID: RES-13768
RELAY_CONTROL_TOP1:RELAY_CONTROL1:UVLO1:R2 = SparkFun-Resistors; PROD_ID: RES-09117
RELAY_CONTROL_TOP1:RELAY_CONTROL1:UVLO1:R3 = SparkFun-Resistors; PROD_ID: RES-10066
RELAY_CONTROL_TOP1:RELAY_CONTROL1:UVLO1:R7 = SparkFun-Resistors; PROD_ID: RES-08597
RELAY_CONTROL_TOP1:RELAY_CONTROL1:UVLO1:R8 = SparkFun-Resistors; PROD_ID: RES-09737
RELAY_CONTROL_TOP1:RELAY_CONTROL1:UVLO1:U1 = LMV762MM; AVAILABILITY: Good; DESCRIPTION: Low Voltage, Precision Comparator with Push-Pull Output 8-VSSOP -40 to 125; MANUFACTURER: Texas Instruments; MPN: LMV762MM/NOPB; PACKAGE: MSOP-8 Texas Instruments; PRICE: 1.26 USD
SENSOR_TOP1:ENCODER1:X1 SENSOR_TOP1:ENCODER2:X1 = power_connectors; DESCRIPTION: CONN TERM BLOCK 4POS 3.5MM; MANUFACTURER: Phoenix Contact; MPN: 1751264
SENSOR_TOP1:IMU1:U$1 = sparkfun-IMU; DESCRIPTION: 9DoF IMU Breakout; MANUFACTURER: Sparkfun; MPN: LSM9DS1-Breakout
SENSOR_TOP1:REACH_GPS1:U$1 = con-hirose-df13; DESCRIPTION: CONN HEADER 6POS 1.25MM SMD GOLD; MANUFACTURER: Hirose; MPN: DF13-6P-1.25V(50); SILK: GPSUART
U301 = LSF0204PWR; AVAILABILITY: Good; DESCRIPTION: 4-Bit Bidirectional Multi-Voltage Level Translator for Open-Drain &amp; Push- Pull 14-TSSOP -40 to 125; MANUFACTURER: Texas Instruments; MPN: LSF0204PWR; PACKAGE: TSSOP-14 Texas Instruments; PRICE: 0.62 USD
X101 = con-molex-micro-fit-3_0; DESCRIPTION: CONN HEADER 2POS RT ANG SMD TIN; MANUFACTURER: Phoenix Contact; MPN: 43045-0209

## Nets
3V3: MICROCONTROLLER1:R9.2 MICROCONTROLLER1:R10.2 MICROCONTROLLER1:U1.16 MICROCONTROLLER1:U$1.3.3V RC_INPUT1:U1.5 SENSOR_TOP1:IMU1:U$1.VDD U301.1
5V: MOTOR_TOP1:JDL.P$1 MOTOR_TOP1:JDR.P$1 MOTOR_TOP1:X6.P$1 MOTOR_TOP1:X7.P$1 MOTOR_TOP1:X8.P$1 POWER_TOP1:C4.1 POWER_TOP1:F1.1 POWER_TOP1:MOV2.1 POWER_TOP1:R3.2 RC_INPUT1:X1.P$2 RELAY_CONTROL_TOP1:ISO1:U1.8 SENSOR_TOP1:ENCODER1:X1.1 SENSOR_TOP1:ENCODER2:X1.1 SENSOR_TOP1:REACH_GPS1:U$1.P$6 U301.8 U301.14
5V_ISO: RELAY_CONTROL_TOP1:ISO1:U1.1 RELAY_CONTROL_TOP1:ISO1:U2.4 RELAY_CONTROL_TOP1:REGULATOR1:U1.1 RELAY_CONTROL_TOP1:RELAY_CONTROL1:UVLO1:R2.2 RELAY_CONTROL_TOP1:RELAY_CONTROL1:UVLO1:U1.8
12V: MICROCONTROLLER1:U$1.VIN POWER_TOP1:C2.1 POWER_TOP1:C3.1 POWER_TOP1:F2.1 POWER_TOP1:MOV1.1 POWER_TOP1:R2.2 POWER_TOP1:U$1.VIN1 POWER_TOP1:U$1.VIN2 POWER_TOP1:U$1.VIN3 X101.P$1
36V: POWER_TOP1:C1.1 POWER_TOP1:R4.2 POWER_TOP1:U$2.+VIN RELAY_CONTROL_TOP1:D2.1 RELAY_CONTROL_TOP1:D2.2
GND: JETSON1:JETSON_J17_UART1:JP3.1 JETSON1:JETSON_TX2_J21_EXPANSION1:LED1.2 JETSON1:JETSON_TX2_J21_EXPANSION1:LED2.2 JETSON1:JETSON_TX2_J21_EXPANSION1:LED3.2 JETSON1:JETSON_TX2_J21_EXPANSION1:LED4.2 JETSON1:JETSON_TX2_J21_EXPANSION1:LED5.2 JETSON1:JETSON_TX2_J21_EXPANSION1:LED6.2 JETSON1:JETSON_TX2_J21_EXPANSION1:LED7.2 JETSON1:JETSON_TX2_J21_EXPANSION1:LED8.2 JETSON1:JETSON_TX2_J21_EXPANSION1:U1.1 JETSON1:JETSON_TX2_J21_EXPANSION1:U1.2 JETSON1:JETSON_TX2_J21_EXPANSION1:U1.3 JETSON1:JETSON_TX2_J21_EXPANSION1:U1.8 JETSON1:JETSON_TX2_J21_EXPANSION1:U$3.6 JETSON1:JETSON_TX2_J21_EXPANSION1:U$3.9 JETSON1:JETSON_TX2_J21_EXPANSION1:U$3.14 JETSON1:JETSON_TX2_J21_EXPANSION1:U$3.20 JETSON1:JETSON_TX2_J21_EXPANSION1:U$3.25 JETSON1:JETSON_TX2_J21_EXPANSION1:U$3.30 JETSON1:JETSON_TX2_J21_EXPANSION1:U$3.34 JETSON1:JETSON_TX2_J21_EXPANSION1:U$3.39 MICROCONTROLLER1:LED1.2 MICROCONTROLLER1:LED2.2 MICROCONTROLLER1:LED3.2 MICROCONTROLLER1:LED4.2 MICROCONTROLLER1:LED5.2 MICROCONTROLLER1:LED6.2 MICROCONTROLLER1:LED7.2 MICROCONTROLLER1:LED8.2 MICROCONTROLLER1:U1.1 MICROCONTROLLER1:U1.2 MICROCONTROLLER1:U1.3 MICROCONTROLLER1:U1.8 MICROCONTROLLER1:U$1.GND@0 MICROCONTROLLER1:U$1.GND@1 MICROCONTROLLER1:U$1.GND@2 MICROCONTROLLER1:U$1.GND@3 MICROCONTROLLER1:U$1.GND@4 MOTOR_TOP1:JDL.P$6 MOTOR_TOP1:JDR.P$6 MOTOR_TOP1:X3.P$1 MOTOR_TOP1:X4.P$1 MOTOR_TOP1:X5.P$1 MOTOR_TOP1:X6.P$3 MOTOR_TOP1:X7.P$3 MOTOR_TOP1:X8.P$3 POWER_TOP1:C1.2 POWER_TOP1:C2.2 POWER_TOP1:C3.2 POWER_TOP1:C4.2 POWER_TOP1:LED1.2 POWER_TOP1:LED2.2 POWER_TOP1:LED3.2 POWER_TOP1:MOV1.2 POWER_TOP1:MOV2.2 POWER_TOP1:U$1.ENABLE POWER_TOP1:U$1.GND1 POWER_TOP1:U$1.GND2 POWER_TOP1:U$1.GND3 POWER_TOP1:U$1.GND4 POWER_TOP1:U$2.-VIN POWER_TOP1:U$2.-VOUT POWER_TOP1:U$2.ENABLE RC_INPUT1:U1.3 RC_INPUT1:X1.P$1 RELAY_CONTROL_TOP1:ISO1:R2.1 RELAY_CONTROL_TOP1:ISO1:U1.5 RELAY_CONTROL_TOP1:ISO1:U2.2 RELAY_CONTROL_TOP1:JBAT.P$1 RELAY_CONTROL_TOP1:MOV1.2 RELAY_CONTROL_TOP1:R1.2 SENSOR_TOP1:ENCODER1:X1.2 SENSOR_TOP1:ENCODER2:X1.2 SENSOR_TOP1:IMU1:U$1.GND SENSOR_TOP1:REACH_GPS1:U$1.P$1 U301.7 X101.P$2
GND_ISO: RELAY_CONTROL_TOP1:ISO1:R1.1 RELAY_CONTROL_TOP1:ISO1:R6.1 RELAY_CONTROL_TOP1:ISO1:U1.3 RELAY_CONTROL_TOP1:ISO1:U1.4 RELAY_CONTROL_TOP1:JISO.P$1 RELAY_CONTROL_TOP1:R1.1 RELAY_CONTROL_TOP1:REGULATOR1:U1.2 RELAY_CONTROL_TOP1:REGULATOR1:U1.3 RELAY_CONTROL_TOP1:REGULATOR1:U1.6 RELAY_CONTROL_TOP1:REGULATOR1:U1.7 RELAY_CONTROL_TOP1:RELAY_CONTROL1:R11.2 RELAY_CONTROL_TOP1:RELAY_CONTROL1:R13.2 RELAY_CONTROL_TOP1:RELAY_CONTROL1:RCCD.1 RELAY_CONTROL_TOP1:RELAY_CONTROL1:U$2.3 RELAY_CONTROL_TOP1:RELAY_CONTROL1:UVLO1:R3.1 RELAY_CONTROL_TOP1:RELAY_CONTROL1:UVLO1:R7.1 RELAY_CONTROL_TOP1:RELAY_CONTROL1:UVLO1:U1.4
JETSON1:JETSON_TX2_J21_EXPANSION1:AO_DMIC_IN_CLK_LVL: JETSON1:JETSON_TX2_J21_EXPANSION1:U$3.32
JETSON1:JETSON_TX2_J21_EXPANSION1:AO_DMIC_IN_DAT_LVL: JETSON1:JETSON_TX2_J21_EXPANSION1:U$3.16
JETSON1:JETSON_TX2_J21_EXPANSION1:AP_WAKE_BT_3V3: JETSON1:JETSON_TX2_J21_EXPANSION1:U$3.33
JETSON1:JETSON_TX2_J21_EXPANSION1:AUD_RST_LVL: JETSON1:JETSON_TX2_J21_EXPANSION1:U$3.29
JETSON1:JETSON_TX2_J21_EXPANSION1:AUDIO_CDC_IRQ_LVL: JETSON1:JETSON_TX2_J21_EXPANSION1:U$3.13
JETSON1:JETSON_TX2_J21_EXPANSION1:AUDIO_I2S_MCLK_3V3: JETSON1:JETSON_TX2_J21_EXPANSION1:U$3.7
JETSON1:JETSON_TX2_J21_EXPANSION1:AUDIO_I2S_SFSYNC_3V3: JETSON1:JETSON_TX2_J21_EXPANSION1:U$3.35
JETSON1:JETSON_TX2_J21_EXPANSION1:AUDIO_I2S_SIN_3V3: JETSON1:JETSON_TX2_J21_EXPANSION1:U$3.38
JETSON1:JETSON_TX2_J21_EXPANSION1:AUDIO_I2S_SOUT_3V3: JETSON1:JETSON_TX2_J21_EXPANSION1:U$3.40
JETSON1:JETSON_TX2_J21_EXPANSION1:AUDIO_I2S_SRCLK_3V3: JETSON1:JETSON_TX2_J21_EXPANSION1:U$3.12
JETSON1:JETSON_TX2_J21_EXPANSION1:GPIO_EXP_P16_3V3: JETSON1:JETSON_TX2_J21_EXPANSION1:U$3.22
JETSON1:JETSON_TX2_J21_EXPANSION1:GPIO_EXP_P17_3V3: JETSON1:JETSON_TX2_J21_EXPANSION1:U$3.15
JETSON1:JETSON_TX2_J21_EXPANSION1:I2C_GP1_CLK_3V3: JETSON1:JETSON_TX2_J21_EXPANSION1:R10.1 JETSON1:JETSON_TX2_J21_EXPANSION1:U1.14 JETSON1:JETSON_TX2_J21_EXPANSION1:U$3.28
JETSON1:JETSON_TX2_J21_EXPANSION1:I2C_GP1_DAT_3V3: JETSON1:JETSON_TX2_J21_EXPANSION1:R9.1 JETSON1:JETSON_TX2_J21_EXPANSION1:U1.15 JETSON1:JETSON_TX2_J21_EXPANSION1:U$3.27
JETSON1:JETSON_TX2_J21_EXPANSION1:MDM_WAKE_AP_LVL: JETSON1:JETSON_TX2_J21_EXPANSION1:U$3.18
JETSON1:JETSON_TX2_J21_EXPANSION1:MOTION_INT_AP_L_LVL: JETSON1:JETSON_TX2_J21_EXPANSION1:U$3.31
JETSON1:JETSON_TX2_J21_EXPANSION1:N$1: JETSON1:JETSON_TX2_J21_EXPANSION1:LED8.1 JETSON1:JETSON_TX2_J21_EXPANSION1:R8.1
JETSON1:JETSON_TX2_J21_EXPANSION1:N$2: JETSON1:JETSON_TX2_J21_EXPANSION1:LED7.1 JETSON1:JETSON_TX2_J21_EXPANSION1:R7.1
JETSON1:JETSON_TX2_J21_EXPANSION1:N$3: JETSON1:JETSON_TX2_J21_EXPANSION1:LED6.1 JETSON1:JETSON_TX2_J21_EXPANSION1:R6.1
JETSON1:JETSON_TX2_J21_EXPANSION1:N$4: JETSON1:JETSON_TX2_J21_EXPANSION1:LED5.1 JETSON1:JETSON_TX2_J21_EXPANSION1:R5.1
JETSON1:JETSON_TX2_J21_EXPANSION1:N$5: JETSON1:JETSON_TX2_J21_EXPANSION1:LED4.1 JETSON1:JETSON_TX2_J21_EXPANSION1:R4.1
JETSON1:JETSON_TX2_J21_EXPANSION1:N$6: JETSON1:JETSON_TX2_J21_EXPANSION1:LED3.1 JETSON1:JETSON_TX2_J21_EXPANSION1:R3.1
JETSON1:JETSON_TX2_J21_EXPANSION1:N$7: JETSON1:JETSON_TX2_J21_EXPANSION1:LED2.1 JETSON1:JETSON_TX2_J21_EXPANSION1:R2.1
JETSON1:JETSON_TX2_J21_EXPANSION1:N$8: JETSON1:JETSON_TX2_J21_EXPANSION1:LED1.1 JETSON1:JETSON_TX2_J21_EXPANSION1:R1.1
JETSON1:JETSON_TX2_J21_EXPANSION1:N$9: JETSON1:JETSON_TX2_J21_EXPANSION1:R8.2 JETSON1:JETSON_TX2_J21_EXPANSION1:U1.12
JETSON1:JETSON_TX2_J21_EXPANSION1:N$10: JETSON1:JETSON_TX2_J21_EXPANSION1:R7.2 JETSON1:JETSON_TX2_J21_EXPANSION1:U1.11
JETSON1:JETSON_TX2_J21_EXPANSION1:N$11: JETSON1:JETSON_TX2_J21_EXPANSION1:R6.2 JETSON1:JETSON_TX2_J21_EXPANSION1:U1.10
JETSON1:JETSON_TX2_J21_EXPANSION1:N$12: JETSON1:JETSON_TX2_J21_EXPANSION1:R5.2 JETSON1:JETSON_TX2_J21_EXPANSION1:U1.9
JETSON1:JETSON_TX2_J21_EXPANSION1:N$13: JETSON1:JETSON_TX2_J21_EXPANSION1:R4.2 JETSON1:JETSON_TX2_J21_EXPANSION1:U1.7
JETSON1:JETSON_TX2_J21_EXPANSION1:N$14: JETSON1:JETSON_TX2_J21_EXPANSION1:R3.2 JETSON1:JETSON_TX2_J21_EXPANSION1:U1.6
JETSON1:JETSON_TX2_J21_EXPANSION1:N$15: JETSON1:JETSON_TX2_J21_EXPANSION1:R2.2 JETSON1:JETSON_TX2_J21_EXPANSION1:U1.5
JETSON1:JETSON_TX2_J21_EXPANSION1:N$16: JETSON1:JETSON_TX2_J21_EXPANSION1:R1.2 JETSON1:JETSON_TX2_J21_EXPANSION1:U1.4
JETSON1:JETSON_TX2_J21_EXPANSION1:SAR_TOUT_LVL: JETSON1:JETSON_TX2_J21_EXPANSION1:U$3.37
JETSON1:JETSON_TX2_J21_EXPANSION1:SPI1_CS0_3V3: JETSON1:JETSON_TX2_J21_EXPANSION1:U$3.24
JETSON1:JETSON_TX2_J21_EXPANSION1:SPI1_MISO_3V3: JETSON1:JETSON_TX2_J21_EXPANSION1:U$3.21
JETSON1:JETSON_TX2_J21_EXPANSION1:SPI1_MOSI_3V3: JETSON1:JETSON_TX2_J21_EXPANSION1:U$3.19
JETSON1:JETSON_TX2_J21_EXPANSION1:SPI1_SCK_3V3: JETSON1:JETSON_TX2_J21_EXPANSION1:U$3.23
JETSON1:JETSON_TX2_J21_EXPANSION1:UART1_CTS_HDR_3V3: JETSON1:JETSON_TX2_J21_EXPANSION1:U$3.36
JETSON1:JETSON_TX2_J21_EXPANSION1:UART1_RTS_HDR_3V3: JETSON1:JETSON_TX2_J21_EXPANSION1:U$3.11
JETSON1:JETSON_TX2_J21_EXPANSION1:VDD_3V3_SYS: JETSON1:JETSON_TX2_J21_EXPANSION1:R9.2 JETSON1:JETSON_TX2_J21_EXPANSION1:R10.2 JETSON1:JETSON_TX2_J21_EXPANSION1:U1.16 JETSON1:JETSON_TX2_J21_EXPANSION1:U$3.1 JETSON1:JETSON_TX2_J21_EXPANSION1:U$3.17
JETSON1:JETSON_TX2_J21_EXPANSION1:VDD_5V0_IO_SYS: JETSON1:JETSON_TX2_J21_EXPANSION1:U$3.2 JETSON1:JETSON_TX2_J21_EXPANSION1:U$3.4
MICROCONTROLLER1:11: MICROCONTROLLER1:U$1.11
MICROCONTROLLER1:12: MICROCONTROLLER1:U$1.12
MICROCONTROLLER1:13: MICROCONTROLLER1:U$1.13
MICROCONTROLLER1:23: MICROCONTROLLER1:U$1.23
MICROCONTROLLER1:26: MICROCONTROLLER1:U$1.26
MICROCONTROLLER1:35: MICROCONTROLLER1:U$1.35
MICROCONTROLLER1:36: MICROCONTROLLER1:U$1.36
MICROCONTROLLER1:37: MICROCONTROLLER1:U$1.37
MICROCONTROLLER1:38: MICROCONTROLLER1:U$1.38
MICROCONTROLLER1:39: MICROCONTROLLER1:U$1.39
MICROCONTROLLER1:40: MICROCONTROLLER1:U$1.40
MICROCONTROLLER1:41: MICROCONTROLLER1:U$1.41
MICROCONTROLLER1:42: MICROCONTROLLER1:U$1.42
MICROCONTROLLER1:43: MICROCONTROLLER1:U$1.43
MICROCONTROLLER1:44: MICROCONTROLLER1:U$1.44
MICROCONTROLLER1:45: MICROCONTROLLER1:U$1.45
MICROCONTROLLER1:46: MICROCONTROLLER1:U$1.46
MICROCONTROLLER1:47: MICROCONTROLLER1:U$1.47
MICROCONTROLLER1:48: MICROCONTROLLER1:U$1.48
MICROCONTROLLER1:49: MICROCONTROLLER1:U$1.49
MICROCONTROLLER1:50: MICROCONTROLLER1:U$1.50
MICROCONTROLLER1:51: MICROCONTROLLER1:U$1.51
MICROCONTROLLER1:52: MICROCONTROLLER1:U$1.52
MICROCONTROLLER1:53: MICROCONTROLLER1:U$1.53
MICROCONTROLLER1:A9: MICROCONTROLLER1:U$1.A9
MICROCONTROLLER1:A10: MICROCONTROLLER1:U$1.A10
MICROCONTROLLER1:A11: MICROCONTROLLER1:U$1.A11
MICROCONTROLLER1:A12: MICROCONTROLLER1:U$1.A12
MICROCONTROLLER1:A13: MICROCONTROLLER1:U$1.A13
MICROCONTROLLER1:A14: MICROCONTROLLER1:U$1.A14
MICROCONTROLLER1:A15: MICROCONTROLLER1:U$1.A15
MICROCONTROLLER1:AREF: MICROCONTROLLER1:U$1.AREF
MICROCONTROLLER1:LED_SCL: MICROCONTROLLER1:R10.1 MICROCONTROLLER1:U1.14 MICROCONTROLLER1:U$1.21
MICROCONTROLLER1:LED_SDA: MICROCONTROLLER1:R9.1 MICROCONTROLLER1:U1.15 MICROCONTROLLER1:U$1.20
MICROCONTROLLER1:N$1: MICROCONTROLLER1:LED8.1 MICROCONTROLLER1:R8.1
MICROCONTROLLER1:N$2: MICROCONTROLLER1:R1.2 MICROCONTROLLER1:U1.4
MICROCONTROLLER1:N$3: MICROCONTROLLER1:LED7.1 MICROCONTROLLER1:R7.1
MICROCONTROLLER1:N$12: MICROCONTROLLER1:LED6.1 MICROCONTROLLER1:R6.1
MICROCONTROLLER1:N$13: MICROCONTROLLER1:LED5.1 MICROCONTROLLER1:R5.1
MICROCONTROLLER1:N$14: MICROCONTROLLER1:LED4.1 MICROCONTROLLER1:R4.1
MICROCONTROLLER1:N$15: MICROCONTROLLER1:LED3.1 MICROCONTROLLER1:R3.1
MICROCONTROLLER1:N$16: MICROCONTROLLER1:LED2.1 MICROCONTROLLER1:R2.1
MICROCONTROLLER1:N$17: MICROCONTROLLER1:LED1.1 MICROCONTROLLER1:R1.1
MICROCONTROLLER1:N$18: MICROCONTROLLER1:R8.2 MICROCONTROLLER1:U1.12
MICROCONTROLLER1:N$19: MICROCONTROLLER1:R7.2 MICROCONTROLLER1:U1.11
MICROCONTROLLER1:N$20: MICROCONTROLLER1:R6.2 MICROCONTROLLER1:U1.10
MICROCONTROLLER1:N$21: MICROCONTROLLER1:R5.2 MICROCONTROLLER1:U1.9
MICROCONTROLLER1:N$22: MICROCONTROLLER1:R4.2 MICROCONTROLLER1:U1.7
MICROCONTROLLER1:N$23: MICROCONTROLLER1:R3.2 MICROCONTROLLER1:U1.6
MICROCONTROLLER1:N$24: MICROCONTROLLER1:R2.2 MICROCONTROLLER1:U1.5
MICROCONTROLLER1:RST: MICROCONTROLLER1:U$1.RESET
MICROCONTROLLER1:RX0: MICROCONTROLLER1:U$1.1
MICROCONTROLLER1:RX3: MICROCONTROLLER1:U$1.15
MICROCONTROLLER1:TX0: MICROCONTROLLER1:U$1.0
MICROCONTROLLER1:TX2: MICROCONTROLLER1:U$1.16
MICROCONTROLLER1:TX3: MICROCONTROLLER1:U$1.14
MOW_EN: MICROCONTROLLER1:U$1.28 RELAY_CONTROL_TOP1:ISO1:R3.2
N$1: MICROCONTROLLER1:U$1.7 MOTOR_TOP1:JDR.P$3
N$2: JETSON1:JETSON_TX2_J21_EXPANSION1:U$3.10 SENSOR_TOP1:REACH_GPS1:U$1.P$4
N$3: MICROCONTROLLER1:U$1.22 MOTOR_TOP1:JDL.P$4
N$4: MICROCONTROLLER1:U$1.A0 MOTOR_TOP1:JDL.P$5
N$5: MICROCONTROLLER1:U$1.6 MOTOR_TOP1:JDR.P$2
N$6: JETSON1:JETSON_TX2_J21_EXPANSION1:U$3.8 SENSOR_TOP1:REACH_GPS1:U$1.P$5
N$7: MICROCONTROLLER1:U$1.25 MOTOR_TOP1:JDR.P$4
N$8: MICROCONTROLLER1:U$1.A1 MOTOR_TOP1:JDR.P$5
N$9: MICROCONTROLLER1:U$1.33 MOTOR_TOP1:X5.P$2
N$10: MICROCONTROLLER1:U$1.34 MOTOR_TOP1:X5.P$3
N$11: MICROCONTROLLER1:U$1.10 MOTOR_TOP1:X5.P$4
N$12: MICROCONTROLLER1:U$1.A8 MOTOR_TOP1:X8.P$2
N$13: MICROCONTROLLER1:U$1.A7 MOTOR_TOP1:X5.P$5
N$14: MICROCONTROLLER1:U$1.A6 MOTOR_TOP1:X7.P$2
N$15: MICROCONTROLLER1:U$1.A5 MOTOR_TOP1:X4.P$5
N$16: MICROCONTROLLER1:U$1.9 MOTOR_TOP1:X4.P$4
N$17: MICROCONTROLLER1:U$1.32 MOTOR_TOP1:X4.P$3
N$18: MICROCONTROLLER1:U$1.31 MOTOR_TOP1:X4.P$2
N$19: JETSON1:JETSON_TX2_J21_EXPANSION1:U$3.5 SENSOR_TOP1:IMU1:U$1.SCL
N$20: JETSON1:JETSON_TX2_J21_EXPANSION1:U$3.3 SENSOR_TOP1:IMU1:U$1.SDA
N$21: MICROCONTROLLER1:U$1.A4 MOTOR_TOP1:X6.P$2
N$22: MICROCONTROLLER1:U$1.A3 MOTOR_TOP1:X3.P$5
N$23: MICROCONTROLLER1:U$1.8 MOTOR_TOP1:X3.P$4
N$24: MICROCONTROLLER1:U$1.30 MOTOR_TOP1:X3.P$3
N$25: MICROCONTROLLER1:U$1.29 MOTOR_TOP1:X3.P$2
N$26: MICROCONTROLLER1:U$1.5 MOTOR_TOP1:JDL.P$3
N$27: MICROCONTROLLER1:U$1.4 MOTOR_TOP1:JDL.P$2
N$28: JETSON1:JETSON_J17_UART1:JP3.5 MICROCONTROLLER1:U$1.19
N$29: JETSON1:JETSON_J17_UART1:JP3.4 MICROCONTROLLER1:U$1.18
N$30: MICROCONTROLLER1:U$1.17 RC_INPUT1:U1.4
N$31: MICROCONTROLLER1:U$1.2 U301.4
N$32: MICROCONTROLLER1:U$1.24 U301.5
N$33: MICROCONTROLLER1:U$1.3 U301.2
N$34: MICROCONTROLLER1:U$1.27 U301.3
POWER_TOP1:N$1: POWER_TOP1:F2.2 POWER_TOP1:U$2.+VOUT
POWER_TOP1:N$2: POWER_TOP1:F1.2 POWER_TOP1:U$1.VOUT1 POWER_TOP1:U$1.VOUT2 POWER_TOP1:U$1.VOUT3
POWER_TOP1:N$3: POWER_TOP1:LED1.1 POWER_TOP1:R4.1
POWER_TOP1:N$4: POWER_TOP1:LED2.1 POWER_TOP1:R2.1
POWER_TOP1:N$5: POWER_TOP1:LED3.1 POWER_TOP1:R3.1
RC_INPUT1:SBUS_SIG_IN: RC_INPUT1:U1.2 RC_INPUT1:X1.P$3
RELAY_CONTROL_TOP1:36V_RAW: RELAY_CONTROL_TOP1:ISO1:R5.2 RELAY_CONTROL_TOP1:JISO.P$2 RELAY_CONTROL_TOP1:R2.1 RELAY_CONTROL_TOP1:REGULATOR1:U1.8 RELAY_CONTROL_TOP1:RELAY_CONTROL1:JTHR.P$2 RELAY_CONTROL_TOP1:RELAY_CONTROL1:UVLO1:R8.2
RELAY_CONTROL_TOP1:ISO1:N$1: RELAY_CONTROL_TOP1:ISO1:R2.2 RELAY_CONTROL_TOP1:ISO1:U1.6
RELAY_CONTROL_TOP1:ISO1:N$2: RELAY_CONTROL_TOP1:ISO1:R5.1 RELAY_CONTROL_TOP1:ISO1:R6.2 RELAY_CONTROL_TOP1:ISO1:U1.2
RELAY_CONTROL_TOP1:ISO1:N$3: RELAY_CONTROL_TOP1:ISO1:R1.2 RELAY_CONTROL_TOP1:ISO1:R4.2 RELAY_CONTROL_TOP1:ISO1:U2.3
RELAY_CONTROL_TOP1:ISO1:N$4: RELAY_CONTROL_TOP1:ISO1:R3.1 RELAY_CONTROL_TOP1:ISO1:U2.1
RELAY_CONTROL_TOP1:N$1: RELAY_CONTROL_TOP1:FH3.1 RELAY_CONTROL_TOP1:FH3.2 RELAY_CONTROL_TOP1:JBAT.P$2
RELAY_CONTROL_TOP1:N$2: RELAY_CONTROL_TOP1:JMC.P$2 RELAY_CONTROL_TOP1:RELAY_CONTROL1:D2.C RELAY_CONTROL_TOP1:RELAY_CONTROL1:JMOW.P$1
RELAY_CONTROL_TOP1:N$3: RELAY_CONTROL_TOP1:JDC.P$2 RELAY_CONTROL_TOP1:RELAY_CONTROL1:D1.C RELAY_CONTROL_TOP1:RELAY_CONTROL1:JESTP.P$1 RELAY_CONTROL_TOP1:RELAY_CONTROL1:JMOW.P$2
RELAY_CONTROL_TOP1:N$4: RELAY_CONTROL_TOP1:JMC.P$1 RELAY_CONTROL_TOP1:RELAY_CONTROL1:D2.A RELAY_CONTROL_TOP1:RELAY_CONTROL1:RCCB2.2
RELAY_CONTROL_TOP1:N$5: RELAY_CONTROL_TOP1:ISO1:R4.1 RELAY_CONTROL_TOP1:RELAY_CONTROL1:U$2.1
RELAY_CONTROL_TOP1:N$6: RELAY_CONTROL_TOP1:JDC.P$1 RELAY_CONTROL_TOP1:RELAY_CONTROL1:D1.A RELAY_CONTROL_TOP1:RELAY_CONTROL1:RCCB1.2
RELAY_CONTROL_TOP1:N$11: RELAY_CONTROL_TOP1:D2.3 RELAY_CONTROL_TOP1:FH3.3 RELAY_CONTROL_TOP1:FH3.4 RELAY_CONTROL_TOP1:MOV1.1 RELAY_CONTROL_TOP1:R2.2
RELAY_CONTROL_TOP1:RELAY_CONTROL1:!UVLO!: RELAY_CONTROL_TOP1:RELAY_CONTROL1:R1.1 RELAY_CONTROL_TOP1:RELAY_CONTROL1:R3.1 RELAY_CONTROL_TOP1:RELAY_CONTROL1:UVLO1:U1.7
RELAY_CONTROL_TOP1:RELAY_CONTROL1:N$1: RELAY_CONTROL_TOP1:RELAY_CONTROL1:JESTP.P$2 RELAY_CONTROL_TOP1:RELAY_CONTROL1:JTHR.P$1
RELAY_CONTROL_TOP1:RELAY_CONTROL1:N$2: RELAY_CONTROL_TOP1:RELAY_CONTROL1:RCCM.1 RELAY_CONTROL_TOP1:RELAY_CONTROL1:U$2.2 RELAY_CONTROL_TOP1:RELAY_CONTROL1:U$2.4
RELAY_CONTROL_TOP1:RELAY_CONTROL1:N$5: RELAY_CONTROL_TOP1:RELAY_CONTROL1:RCCB2.1 RELAY_CONTROL_TOP1:RELAY_CONTROL1:U$7.2 RELAY_CONTROL_TOP1:RELAY_CONTROL1:U$7.4
RELAY_CONTROL_TOP1:RELAY_CONTROL1:N$6: RELAY_CONTROL_TOP1:RELAY_CONTROL1:RCCM.2 RELAY_CONTROL_TOP1:RELAY_CONTROL1:U$7.3
RELAY_CONTROL_TOP1:RELAY_CONTROL1:N$7: RELAY_CONTROL_TOP1:RELAY_CONTROL1:R3.2 RELAY_CONTROL_TOP1:RELAY_CONTROL1:R11.1 RELAY_CONTROL_TOP1:RELAY_CONTROL1:U$10.1
RELAY_CONTROL_TOP1:RELAY_CONTROL1:N$9: RELAY_CONTROL_TOP1:RELAY_CONTROL1:RCCD.2 RELAY_CONTROL_TOP1:RELAY_CONTROL1:U$10.3
RELAY_CONTROL_TOP1:RELAY_CONTROL1:N$10: RELAY_CONTROL_TOP1:RELAY_CONTROL1:RCCB1.1 RELAY_CONTROL_TOP1:RELAY_CONTROL1:U$10.2 RELAY_CONTROL_TOP1:RELAY_CONTROL1:U$10.4
RELAY_CONTROL_TOP1:RELAY_CONTROL1:N$11: RELAY_CONTROL_TOP1:RELAY_CONTROL1:R1.2 RELAY_CONTROL_TOP1:RELAY_CONTROL1:R13.1 RELAY_CONTROL_TOP1:RELAY_CONTROL1:U$7.1
RELAY_CONTROL_TOP1:RELAY_CONTROL1:UVLO1:N$2: RELAY_CONTROL_TOP1:RELAY_CONTROL1:UVLO1:R4.1 RELAY_CONTROL_TOP1:RELAY_CONTROL1:UVLO1:U1.6
RELAY_CONTROL_TOP1:RELAY_CONTROL1:UVLO1:N$3: RELAY_CONTROL_TOP1:RELAY_CONTROL1:UVLO1:R1.1 RELAY_CONTROL_TOP1:RELAY_CONTROL1:UVLO1:R2.1 RELAY_CONTROL_TOP1:RELAY_CONTROL1:UVLO1:R3.2 RELAY_CONTROL_TOP1:RELAY_CONTROL1:UVLO1:U1.3 RELAY_CONTROL_TOP1:RELAY_CONTROL1:UVLO1:U1.5
RELAY_CONTROL_TOP1:RELAY_CONTROL1:UVLO1:N$4: RELAY_CONTROL_TOP1:RELAY_CONTROL1:UVLO1:R7.2 RELAY_CONTROL_TOP1:RELAY_CONTROL1:UVLO1:R8.1 RELAY_CONTROL_TOP1:RELAY_CONTROL1:UVLO1:U1.2
RELAY_CONTROL_TOP1:RELAY_CONTROL1:UVLO1:UVLO: RELAY_CONTROL_TOP1:RELAY_CONTROL1:UVLO1:R1.2 RELAY_CONTROL_TOP1:RELAY_CONTROL1:UVLO1:R4.2 RELAY_CONTROL_TOP1:RELAY_CONTROL1:UVLO1:U1.1
SENSOR_TOP1:N$1: SENSOR_TOP1:ENCODER1:X1.3 U301.13
SENSOR_TOP1:N$2: SENSOR_TOP1:ENCODER1:X1.4 U301.12
SENSOR_TOP1:N$3: SENSOR_TOP1:ENCODER2:X1.3 U301.11
SENSOR_TOP1:N$4: SENSOR_TOP1:ENCODER2:X1.4 U301.10
VSENSE: MICROCONTROLLER1:U$1.A2 RELAY_CONTROL_TOP1:ISO1:U1.7